# EAGLE board Simple Heart v2 (EAGLE 7.3.0)
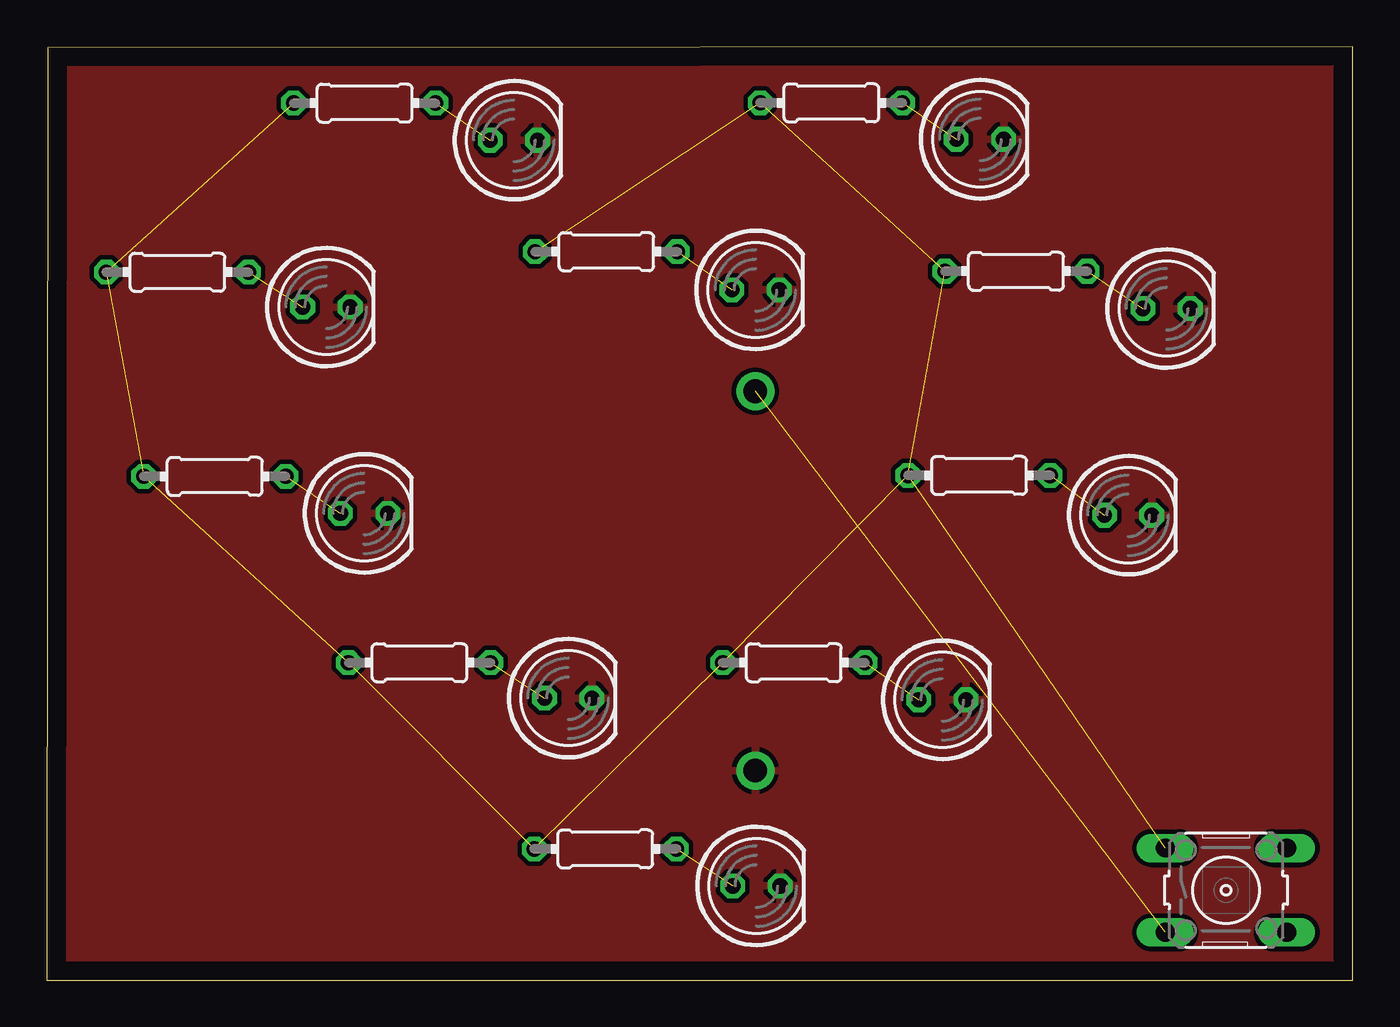
[diagram p0: board, top side]
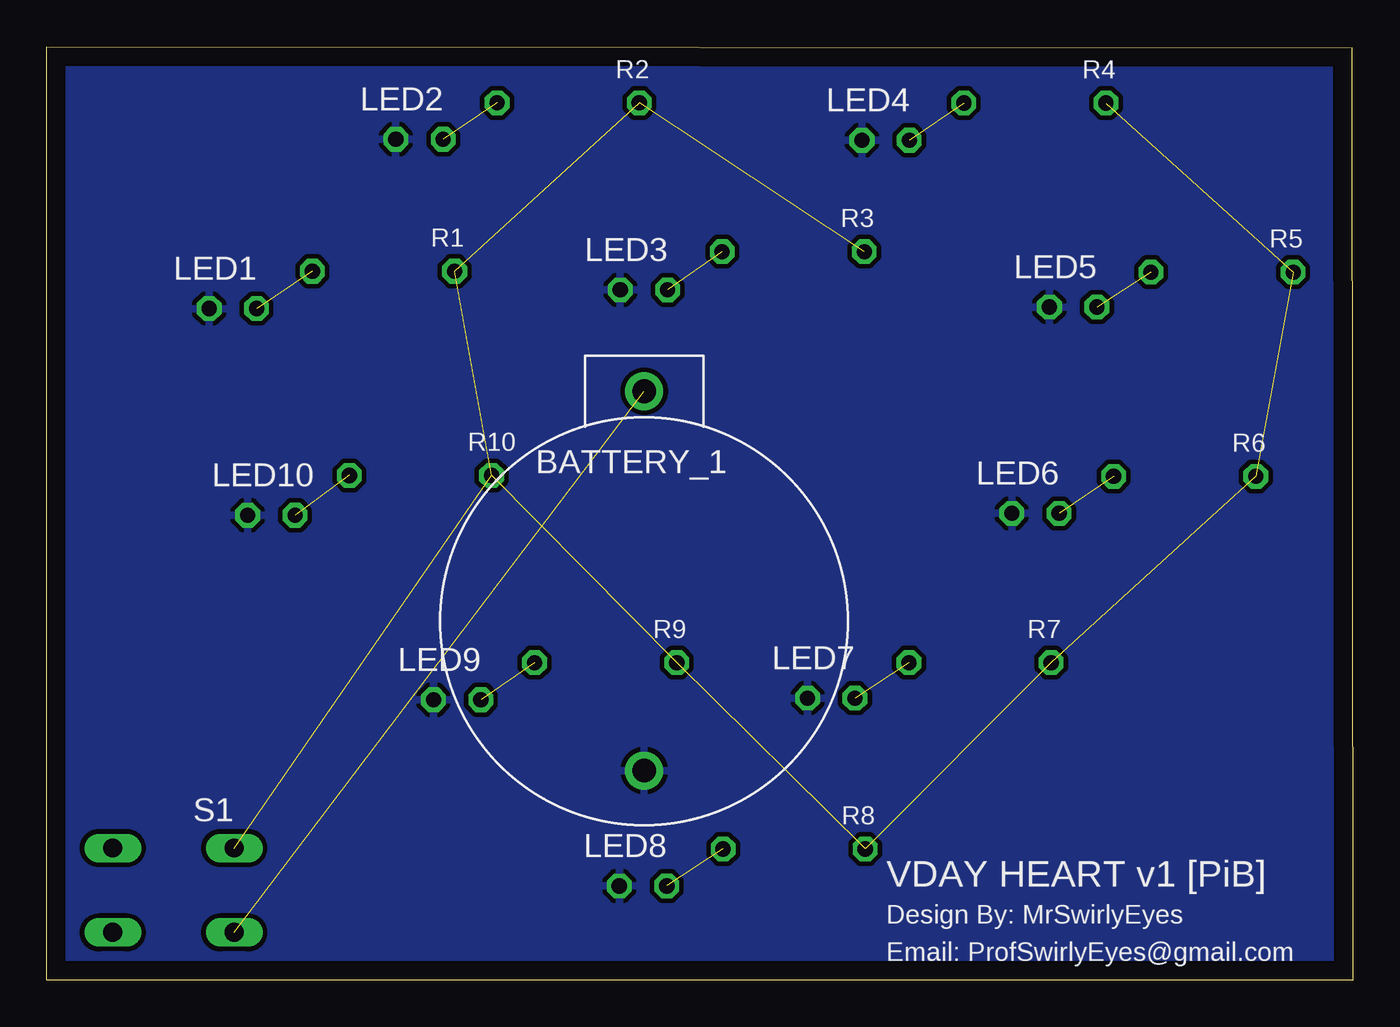
[diagram p1: board, bottom side, seen from below]

Size 70 x 50 mm. Coordinates in mm from the lower left corner, seen from the top.
Outline: 0,0 70,0 70,50 0.05,49.93 0,0
Copper layers (1*16): Top 0.035mm / dielectric 1.5mm / Bottom 0.035mm
Design rules "default": minimum track width 10mil, minimum drill 24mil, track to track 8mil, track to pad 8mil, pad to pad 8mil, via to via 8mil, smd to smd 8mil, copper to edge 40mil, drill to drill 8mil, minimum pad ring 10mil, minimum via ring 8mil, stop-mask expansion 4mil, vias tented up to drill 0mil, thermal gap 10mil

## Footprints (pad centres in the part's own frame; a part is rotated, then mirrored left to right if it is on the bottom)
BATTERY_1236_C = drill 1.27 pad 2.032: + 0,0; - 0,20.32
LED5MM = drill 0.813 octagon: A -1.27,0; K 1.27,0
0204/7 = drill 0.813 octagon: 1 -3.81,0; 2 3.81,0
B3F-10XX = drill 1.016 long: 1 -3.251,2.261; 2 3.251,2.261; 3 -3.251,-2.261; 4 3.251,-2.261

## Placement (x,y rotation side)
BATTERY_1  BATTERY_1236_C  [BATTERY_1236_C]  37.98,31.54 180 bottom
LED1  [LED5MM]  60.02,35.97 0 top
LED2  [LED5MM]  50.02,45.04 0 top
LED3  [LED5MM]  37.99,36.97 0 top
LED4  [LED5MM]  25.04,44.99 0 top
LED5  [LED5MM]  14.99,36.05 0 top
LED6  [LED5MM]  17.01,25 0 top
LED7  [LED5MM]  27.95,15.1 0 top
LED8  [LED5MM]  38.04,5.04 0 top
LED9  [LED5MM]  48,15.01 0 top
LED10  [LED5MM]  57.96,24.9 0 top
R1  [0204/7]  51.95,37.97 0 top
R2  [0204/7]  42.05,46.99 0 top
R3  [0204/7]  29.99,39.02 0 top
R4  [0204/7]  17.04,46.98 0 top
R5  [0204/7]  7.01,37.92 0 top
R6  [0204/7]  9.01,26.98 0 top
R7  [0204/7]  19.98,17 0 top
R8  [0204/7]  29.94,7.02 0 top
R9  [0204/7]  40.04,17 0 top
R10  [0204/7]  49.97,27.03 0 top
S1  [B3F-10XX]  63.2,4.81 0 top

## Library data of the parts
BATTERY_1 = Itead_BP_110825
LED1-LED10 = led
R1-R10 = resistor
S1 = switch-omron; MPN: B3F-1000; OC_FARNELL: 176432; OC_NEWARK: 36M3542

## Nets
GND: BATTERY_1.- LED1.K LED2.K LED3.K LED4.K LED5.K LED6.K LED7.K LED8.K LED9.K LED10.K
N$1: LED1.A R1.2
N$2: LED2.A R2.2
N$3: LED3.A R3.2
N$4: LED4.A R4.2
N$5: LED5.A R5.2
N$6: LED6.A R6.2
N$7: LED7.A R7.2
N$8: LED8.A R8.2
N$9: LED9.A R9.2
N$10: LED10.A R10.2
N$11: BATTERY_1.+ S1.3
N$12: R1.1 R2.1 R3.1 R4.1 R5.1 R6.1 R7.1 R8.1 R9.1 R10.1 S1.1

## Tracks (layer width: path | path; a pad name or v marks a point on that pad's centre or on a via)
GND
  pour Bottom (isolate 0.254): 0,50 70,50 70,0 0,0
  pour Top (isolate 0.254): 0,50 70,50 70,0 0,0
N$1  (1 unrouted)
N$2  (1 unrouted)
N$3  (1 unrouted)
N$4  (1 unrouted)
N$5  (1 unrouted)
N$6  (1 unrouted)
N$7  (1 unrouted)
N$8  (1 unrouted)
N$9  (1 unrouted)
N$10  (1 unrouted)
N$11  (1 unrouted)
N$12  (10 unrouted)

## Text on the board
bPlace: VDAY HEART v1 [PiB] | Design By: MrSwirlyEyes | Email: ProfSwirlyEyes@gmail.com